# Altium PCB IBC_prijamnik_VB_ver2.PcbDoc (part 2 of 2)
Units mm, origin at the board's own origin, x right, y up, seen from the top; angles counter-clockwise.
Board outline 47.7 x 49.61 mm, 4 copper layers (Top Layer, GND 1, GND 2, Bottom Layer), stack 1.562 mm thick; 81 components, 52 nets, 253 pads, 212 vias.
Unrouted connection lines stored in the file: 60.
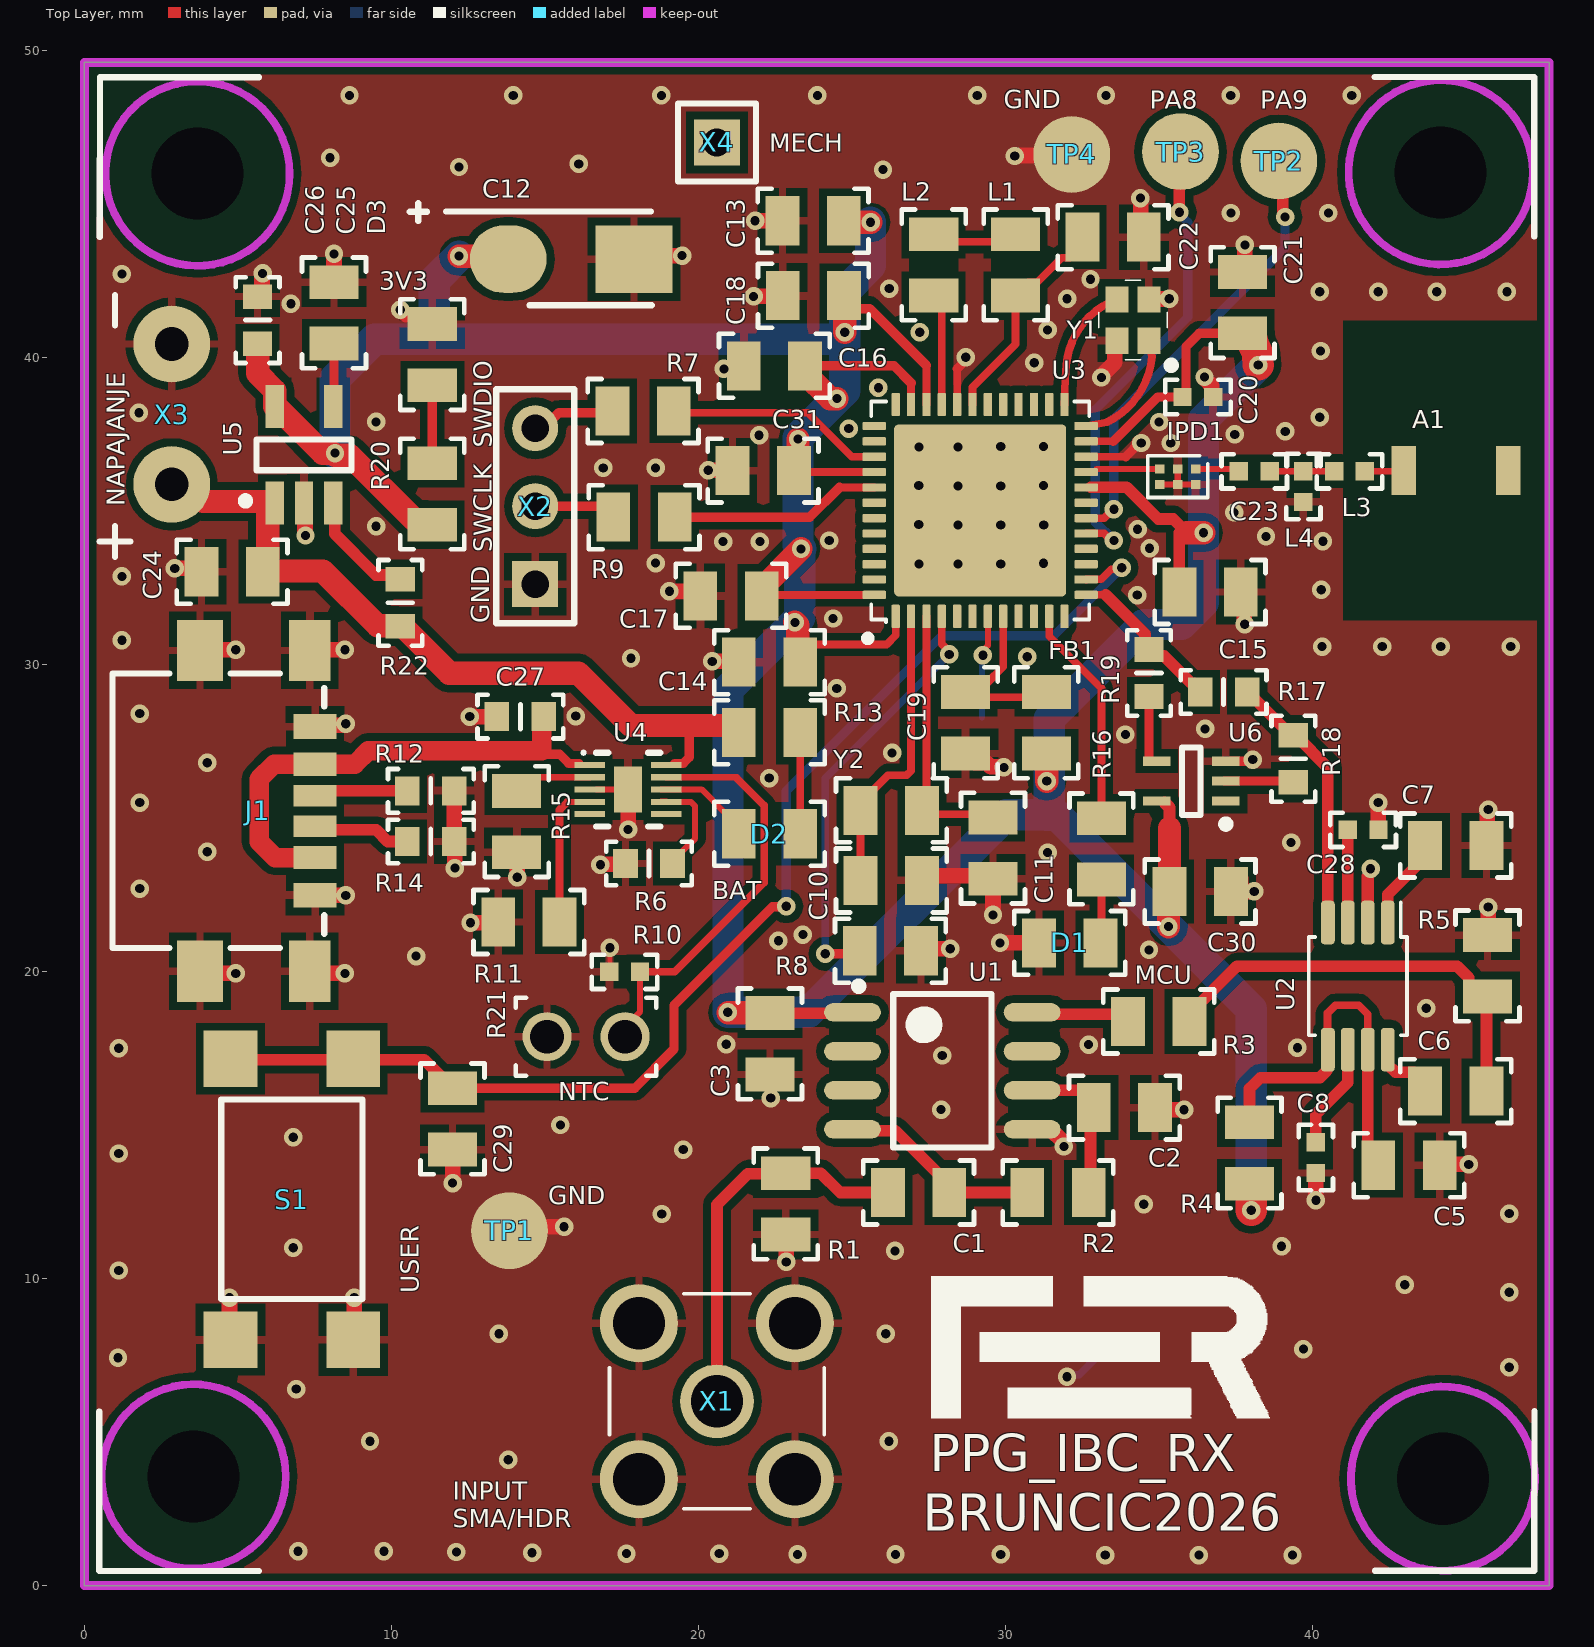
[diagram p0: Top Layer view]

## Via types
v1: diameter 0.6, hole 0.3, Top Layer to Bottom Layer, tented both sides, 212 vias

## Nets (pads, with @x,y where several pads share a name; then routed paths per layer and width w, separated by ;. In a path a pad name is that pad's centre, name@x,y a point inside that pad or via, vN(x,y) a via of type N, cw(c..) or ccw(c..) an arc to the next point about the centre after c; other vN are vias at no path point) (continued)
NetR10_2: R10.2 R21.4 U4.9 | length 13.6
  Top Layer w0.2: R21.4 17.608,18.208 18.094,18.694 R10.2 ; U4.9 21.216,26.325 21.234,26.307
  Top Layer w0.254: R10.2 19.228,19.99 22.14,22.902 22.14,25.401 21.234,26.307
NetR11_2: R11.2 U4.4 | length 4.7
  Top Layer w0.2: 15.735,25.525 U4.4@16.001,25.525 ; U4.4@16.001,25.525 U4.4
  Top Layer w0.254: R11.2 15.474,25.264 15.735,25.525
NetR15_2: R15.2 U4.2 | length 2.6
  Top Layer w0.2: R15.2 14.522,26.327 16.058,26.327 16.06,26.325 U4.2
NetR16_2: R16.2 U3.11 | length 7.3
  Top Layer w0.254: U3.11 31.423,30.921 33.122,29.222 R16.2
NetR17_1: R17.1 R18.1 U2.4 | length 8.7
  Top Layer w0.381: R17.1@37.852,29.21 37.852,29.135 39.295,27.692 R18.1 ; R18.1@39.445,27.692 40.497,26.64 40.497,21.616 U2.4@40.485,21.605
NetR17_2: R17.2 R19.2 U3.13 | length 5.3
  Top Layer w0.25: U3.13 33.267,32.265
  Top Layer w0.254: R19.2@34.544,30.613 R19.2
  Top Layer w0.381: 33.267,32.265 34.544,30.988 R19.2@34.544,30.613 ; R19.2 34.881,30.276 35.158,30.276 36.05,29.385 36.125,29.385 36.335,29.175 R17.2
NetR18_2: R18.2 U6.2 | length 2.3
  Top Layer w0.3: U6.2@37.125,26.2 39.332,26.2 R18.2
NetR19_1: R19.1 U6.4 | length 2.1
  Top Layer w0.305: U6.4@34.671,26.9 R19.1
NetR22_1: R22.1 U5.3 | length 3.8
  Top Layer w0.381: U5.3@8.121,35.254 8.148,35.227 8.148,34.252 9.488,32.912 10.147,32.912 R22.1
NetTP2_1: TP2.1 U3.18 | length 14.8
  Top Layer w0.25: U3.18 33.207,34.765 33.493,35.052 v1(33.528,35.052)
  Top Layer w0.381: TP2.1 39.027,46.273 39.027,44.706 39.102,44.631 v1(39.102,44.572)
  Bottom Layer w0.305: v1(33.528,35.052) 33.528,37.998 39.102,43.573 v1(39.102,44.572)
NetTP3_1: TP3.1 U3.17 | length 14.9
  Top Layer w0.25: U3.17@32.629,34.271 33.207,34.271 33.442,34.036 v1@33.469,34.036
  Top Layer w0.381: v1(35.662,44.729) TP3.1@35.662,46.406
  Bottom Layer w0.305: v1(33.528,34.036) 32.924,34.64 32.924,38.292 35.936,41.304 35.936,44.403 v1@35.662,44.677
NetTP5_1: NRST.1 U3.7 | length 3.3
  Top Layer w0.2: v1@29.185,30.302 29.185,30.378 29.423,30.617 U3.7@29.423,31.515
  Bottom Layer w0.2: NRST.1 v1@29.235,30.226
  other v1: 29.261,30.302
NetU3_24: U3.24 Y1.1 | length 3.9
  Top Layer w0.254: U3.24 32.666,37.773 33.311,37.893 ccw(c32.137,40.26) 33.498,37.995 ccw(c32.137,40.26) 34.769,40.023 34.729,40.243 Y1.1
NetU3_25: U3.25 Y1.3 | length 4.1
  Top Layer w0.254: U3.25 31.926,38.718 31.928,38.885 cw(c45.34,38.535) 31.979,39.755 ; 31.979,39.756 cw(c34.486,39.526) Y1.3
SWCLK: R9.2 U3.41 | length 6.3
  Top Layer w0.25: 24.589,35.765 U3.41
  Top Layer w0.305: 19.78,34.798 23.622,34.798 24.589,35.765
SWDIO: R7.2 U3.39 | length 6.9
  Top Layer w0.254: R7.2@19.424,38.196 23.557,38.196 24.988,36.765 U3.39
VBAT+: C24.2 R13.1 R22.2 U4.10 U5.1 X3.2 | length 25.1
  Top Layer w0.2: U4.10 U4.10@19.225,26.725
  Top Layer w0.3: U4.10@19.225,26.777 19.502,26.777 19.7,26.975 19.7,28.011
  Top Layer w0.762: X3.2 3.315,35.865 3.874,35.306 5.95,35.306 5.969,35.287 5.969,33.179 C24.2@5.834,33.044 ; C24.2 C24.2@5.834,33.044 ; R22.2@10.212,31.242 10.193,31.261 9.548,31.261 7.765,33.044 C24.2@5.834,33.044 ; R22.2@10.362,31.242 11.886,29.718 16.082,29.718 17.789,28.011 19.7,28.011 21.142,28.011 21.311,27.842 R13.1
VBUS: C27.1 J1.A9 J1.B9 U4.1 | length 16.1
  Top Layer w0.3: 14.896,27.193 15.014,27.075 15.475,27.075 15.773,26.777 15.949,26.777 15.951,26.775 U4.1@16.11,26.775
  Top Layer w0.635: J1.A9 6.212,23.71 5.69,24.232 5.69,26.264 6.176,26.75 J1.B9 8.803,26.75 9.246,27.193 14.896,27.193 C27.1@14.896,28.169 ; C27.1 C27.1@14.996,28.269
pads on no net: A1.2 U1.2 U1.3 U1.7 U3.5 U3.6 U3.9 U3.10 U3.12 U3.15 U3.16 U3.19 U3.26 U3.27 U3.28 U3.29 U3.30 U3.36 U3.37 U3.38 U3.42 U3.43 U3.44 U3.45 U3.46 U3.47 U4.5 U4.6 U6.1 X4.1

## Polygon pours and split planes (outlines as drawn)
GND on GND 1 "GND_1" (solid, remove dead copper, pour order 3): 0.546,49.67 48.044,49.67 48.171,49.543 48.171,0.013 0.419,0.013
GND on GND 2 "GND_2" (solid, remove dead copper, pour order 2): 0.102,49.632 47.727,49.632 47.727,-0.013 47.6,-0.14 -0.013,-0.14
GND on Bottom Layer "GND_L04_P005" (solid, remove dead copper, pour order 5): -0.152,49.632 47.549,49.632 47.574,49.606 47.574,0 -0.127,0 -0.152,-0.025
GND on Top Layer "GND_L01_P004" (solid, remove dead copper, pour order 4): 0.102,49.632 0,49.53 0,0 47.701,0 47.701,49.606

## Keep-outs
Keep-Out Layer:
  circle w0.254: c3.683,45.983 r3
  circle w0.254: c44.247,3.48 r3
  circle w0.254: c44.171,46.025 r3
  circle w0.254: c3.556,3.556 r3
  lines w0.3: 0,0 47.701,0 47.701,49.606 0,49.606 0,0

## Other copper
Top Layer:
  pour cut-out: 45.872,43.561 47.066,44.755 47.066,47.066 45.288,48.844 42.926,48.844 41.173,47.092 41.173,44.806 42.748,43.231 44.018,43.231 44.221,43.028 44.298,43.104 45.441,43.104 45.898,43.561
  pour cut-out: 45.949,1.016 47.142,2.21 47.142,4.521 45.364,6.299 43.002,6.299 41.25,4.547 41.25,2.261 42.824,0.686 44.094,0.686 44.298,0.483 44.374,0.559 45.517,0.559 45.974,1.016
  pour cut-out: 5.258,1.092 6.452,2.286 6.452,4.597 4.674,6.375 2.311,6.375 0.559,4.623 0.559,2.337 2.134,0.762 3.404,0.762 3.607,0.559 3.683,0.635 4.826,0.635 5.283,1.092
  pour cut-out: 5.436,43.536 6.629,44.729 6.629,47.041 4.851,48.819 0.737,48.819 0.737,44.78 2.311,43.205 3.581,43.205 3.785,43.002 3.861,43.078 5.004,43.078 5.461,43.536
  pour cut-out: 31.14,43.472 29.515,43.472 29.515,42.532 31.14,42.532
  pour cut-out: 28.473,43.459 26.848,43.459 26.848,42.52 28.473,42.52
  pour cut-out: 40.974,31.416 47.474,31.416 47.474,41.216 40.974,41.216
GND 1:
  pour cut-out: 45.872,43.561 47.066,44.755 47.066,47.066 45.288,48.844 42.926,48.844 41.173,47.092 41.173,44.806 42.748,43.231 44.018,43.231 44.221,43.028 44.298,43.104 45.441,43.104 45.898,43.561
  pour cut-out: 45.949,1.016 47.142,2.21 47.142,4.521 45.364,6.299 43.002,6.299 41.25,4.547 41.25,2.261 42.824,0.686 44.094,0.686 44.298,0.483 44.374,0.559 45.517,0.559 45.974,1.016
  pour cut-out: 5.258,1.092 6.452,2.286 6.452,4.597 4.674,6.375 2.311,6.375 0.559,4.623 0.559,2.337 2.134,0.762 3.404,0.762 3.607,0.559 3.683,0.635 4.826,0.635 5.283,1.092
  pour cut-out: 5.436,43.536 6.629,44.729 6.629,47.041 4.851,48.819 0.737,48.819 0.737,44.78 2.311,43.205 3.581,43.205 3.785,43.002 3.861,43.078 5.004,43.078 5.461,43.536
  pour cut-out: 30.353,18.974 31.775,18.974 31.775,18.364 30.353,18.364
  pour cut-out: 24.079,15.164 25.654,15.164 25.654,14.554 24.079,14.554
  pour cut-out: 40.973,31.424 47.473,31.424 47.473,41.224 40.973,41.224
GND 2:
  pour cut-out: 45.898,43.561 47.092,44.755 47.092,47.066 45.314,48.844 42.951,48.844 41.199,47.092 41.199,44.806 42.774,43.231 44.044,43.231 44.247,43.028 44.323,43.104 45.466,43.104 45.923,43.561
  pour cut-out: 45.974,1.016 47.168,2.21 47.168,4.521 45.39,6.299 43.028,6.299 41.275,4.547 41.275,2.261 42.85,0.686 44.12,0.686 44.323,0.483 44.399,0.559 45.542,0.559 45.999,1.016
  pour cut-out: 5.283,1.092 6.477,2.286 6.477,4.597 4.699,6.375 2.337,6.375 0.584,4.623 0.584,2.337 2.159,0.762 3.429,0.762 3.632,0.559 3.708,0.635 4.851,0.635 5.309,1.092
  pour cut-out: 5.461,43.536 6.655,44.729 6.655,47.041 4.877,48.819 0.762,48.819 0.762,44.78 2.337,43.205 3.607,43.205 3.81,43.002 3.886,43.078 5.029,43.078 5.486,43.536
  pour cut-out: 40.973,31.424 47.473,31.424 47.473,41.224 40.973,41.224
Bottom Layer:
  pour cut-out: 45.771,43.688 46.965,44.882 46.965,47.193 45.187,48.971 42.824,48.971 41.072,47.219 41.072,44.933 42.647,43.358 43.917,43.358 44.12,43.155 44.196,43.231 45.339,43.231 45.796,43.688
  pour cut-out: 45.847,1.143 47.041,2.337 47.041,4.648 45.263,6.426 42.901,6.426 41.148,4.674 41.148,2.388 42.723,0.813 43.993,0.813 44.196,0.61 44.272,0.686 45.415,0.686 45.872,1.143
  pour cut-out: 5.156,1.219 6.35,2.413 6.35,4.724 4.572,6.502 2.21,6.502 0.457,4.75 0.457,2.464 2.032,0.889 3.302,0.889 3.505,0.686 3.581,0.762 4.724,0.762 5.182,1.219
  pour cut-out: 5.334,43.663 6.528,44.856 6.528,47.168 4.75,48.946 0.737,48.946 0.635,48.844 0.635,44.907 2.21,43.332 3.48,43.332 3.683,43.129 3.759,43.205 4.902,43.205 5.359,43.663
  pour cut-out: 40.97,31.399 47.47,31.399 47.47,41.199 40.97,41.199

## Silkscreen, mask and mechanical layers (free items; w line width, h text height)
Top Overlay:
  drawing of 15 lines, arcs and shapes, not listed
  text "GND" at 29.947,48.108 h0.6
  text "PA8" at 34.7,48.1 h0.6
  text "PA9" at 38.3,48.1 h0.6
  text "MECH" at 22.3,46.7 h0.6
  text "3V3" at 9.6,42.2 h0.6
  text "SWDIO" at 13.259,37.059 h0.6 r90
  text "NAPAJANJE" at 1.321,35.154 h0.6 r90
  text "SWCLK" at 13.259,33.655 h0.6 r90
  text "GND" at 13.183,31.344 h0.6 r90
  text "BAT" at 20.447,22.352 h0.6
  text "MCU" at 34.2,19.6 h0.6
  text "NTC" at 15.429,15.806 h0.6
  text "GND" at 15.113,12.421 h0.6
  text "USER" at 10.893,9.525 h0.6 r90
  text "PPG_IBC_RX" at 27.53,3.727 h1.2
  text "INPUT / SMA/HDR" at 12,1.9 h0.6
  text "BRUNCIC2026" at 27.305,1.778 h1.2
Bottom Overlay:
  lines w0.2: 0.499,43.942 0.508,49.149 5.69,49.149 ; 0.508,5.639 0.508,0.457 5.715,0.448 ; 42.037,0.483 47.219,0.483 47.228,5.69 ; 42.037,49.158 47.244,49.149 47.244,43.967
  text "NTC" at 17.221,15.806 h0.6
Mechanical 1:
  lines w0.3: -0.025,-0.025 -0.025,49.632 6.706,49.632 46.584,49.632 47.727,49.632 47.727,-0.025 0.991,-0.025 -0.025,-0.025
Drill Drawing:
  lines w0.254: -22.119,-31.718 -22.119,-31.367 -21.768,-31.017 -22.119,-30.666 -22.119,-30.316 -21.768,-30.316 -21.418,-30.666 -21.068,-30.316 -20.717,-30.316 -20.717,-30.666 -21.068,-31.017 -20.717,-31.367 -20.717,-31.718 -21.068,-31.718 -21.418,-31.367 -21.768,-31.718 -22.119,-31.718 ; -22.119,-27.162 -20.717,-27.162 -21.418,-28.564 -22.119,-27.162 ; -22.119,-25.059 -21.768,-25.059 -21.768,-25.41 -21.068,-25.41 -21.068,-25.059 -20.717,-25.059 -20.717,-24.358 -21.068,-24.358 -21.068,-24.008 -21.768,-24.008 -21.768,-24.358 -22.119,-24.358 -22.119,-25.059 ; -22.119,-22.255 -20.717,-22.255 -20.717,-20.854 -22.119,-20.854 -22.119,-22.255 ; -22.119,-19.101 -21.418,-18.751 -20.717,-19.101 -21.068,-18.401 -20.717,-17.7 -21.418,-18.05 -22.119,-17.7 -21.768,-18.401 -22.119,-19.101
  lines w0.381: -23.39,-32.664 68.568,-32.664 ; -23.39,-16.894 68.568,-16.894 ; -15.282,-35.818 -15.282,-13.739 ; -7.847,-35.818 -7.847,-13.739 ; 6.807,-35.818 6.807,-13.739 ; 13.096,-35.818 13.096,-13.739 ; 22.249,-35.818 22.249,-13.739 ; 39.573,-35.818 39.573,-13.739 ; 47.074,-35.818 47.074,-13.739 ; 56.874,-35.818 56.874,-13.739 ; -23.39,-35.818 68.568,-35.818 68.568,-13.739 -23.39,-13.739 -23.39,-35.818
  text "Symbol" at -21.497,-15.947 h1.83
  text "Count" at -14.336,-15.947 h1.83
  text "Hole Size" at -6.901,-15.947 h1.83
  text "Plated" at 7.753,-15.947 h1.83
  text "Hole Type" at 14.043,-15.947 h1.83
  text "Drill Layer Pair" at 23.196,-15.947 h1.83
  text "Via/Pad" at 40.519,-15.947 h1.83
  text "Pad Shape" at 48.02,-15.947 h1.83
  text "Template" at 57.821,-15.947 h1.83
  text "212" at -14.336,-19.101 h1.52
  text "0.300mm (11.81mil)" at -6.901,-19.101 h1.52
  text "PTH" at 7.753,-19.101 h1.52
  text "Round" at 14.043,-19.101 h1.52
  text "Top Layer - Bottom Layer" at 23.196,-19.101 h1.52
  text "Via" at 40.519,-19.101 h1.52
  text "Rounded" at 48.02,-19.101 h1.52
  text "v60h30m0mx0" at 57.821,-19.101 h1.52
  text "4" at -14.336,-22.255 h1.52
  text "0.900mm (35.43mil)" at -6.901,-22.255 h1.52
  text "PTH" at 7.753,-22.255 h1.52
  text "Round" at 14.043,-22.255 h1.52
  text "Top Layer - Bottom Layer" at 23.196,-22.255 h1.52
  text "Pad" at 40.519,-22.255 h1.52
  text "(Mixed)" at 48.02,-22.255 h1.52
  text "(Mixed)" at 57.821,-22.255 h1.52
  text "4" at -14.336,-25.41 h1.52
  text "1.100mm (43.31mil)" at -6.901,-25.41 h1.52
  text "PTH" at 7.753,-25.41 h1.52
  text "Round" at 14.043,-25.41 h1.52
  text "Top Layer - Bottom Layer" at 23.196,-25.41 h1.52
  text "Pad" at 40.519,-25.41 h1.52
  text "Rounded" at 48.02,-25.41 h1.52
  text "(Mixed)" at 57.821,-25.41 h1.52
  text "5" at -14.336,-28.564 h1.52
  text "1.700mm (66.93mil)" at -6.901,-28.564 h1.52
  text "PTH" at 7.753,-28.564 h1.52
  text "Round" at 14.043,-28.564 h1.52
  text "Top Layer - Bottom Layer" at 23.196,-28.564 h1.52
  text "Pad" at 40.519,-28.564 h1.52
  text "Rounded" at 48.02,-28.564 h1.52
  text "(Mixed)" at 57.821,-28.564 h1.52
  text "4" at -14.336,-31.718 h1.52
  text "3.000mm (118.11mil)" at -6.901,-31.718 h1.52
  text "NPTH" at 7.753,-31.718 h1.52
  text "Round" at 14.043,-31.718 h1.52
  text "Top Layer - Bottom Layer" at 23.196,-31.718 h1.52
  text "Pad" at 40.519,-31.718 h1.52
  text "Rounded" at 48.02,-31.718 h1.52
  text "c0hn300" at 57.821,-31.718 h1.52
  text "229 Total" at -14.336,-34.872 h1.52

## Dimensions
-0.025,-0.025 to -0.025,49.632 on Mechanical 1
-0.025,-0.025 to 47.727,-0.025 on Mechanical 1